# EAGLE board dsub50_molex (EAGLE 9.3.0)
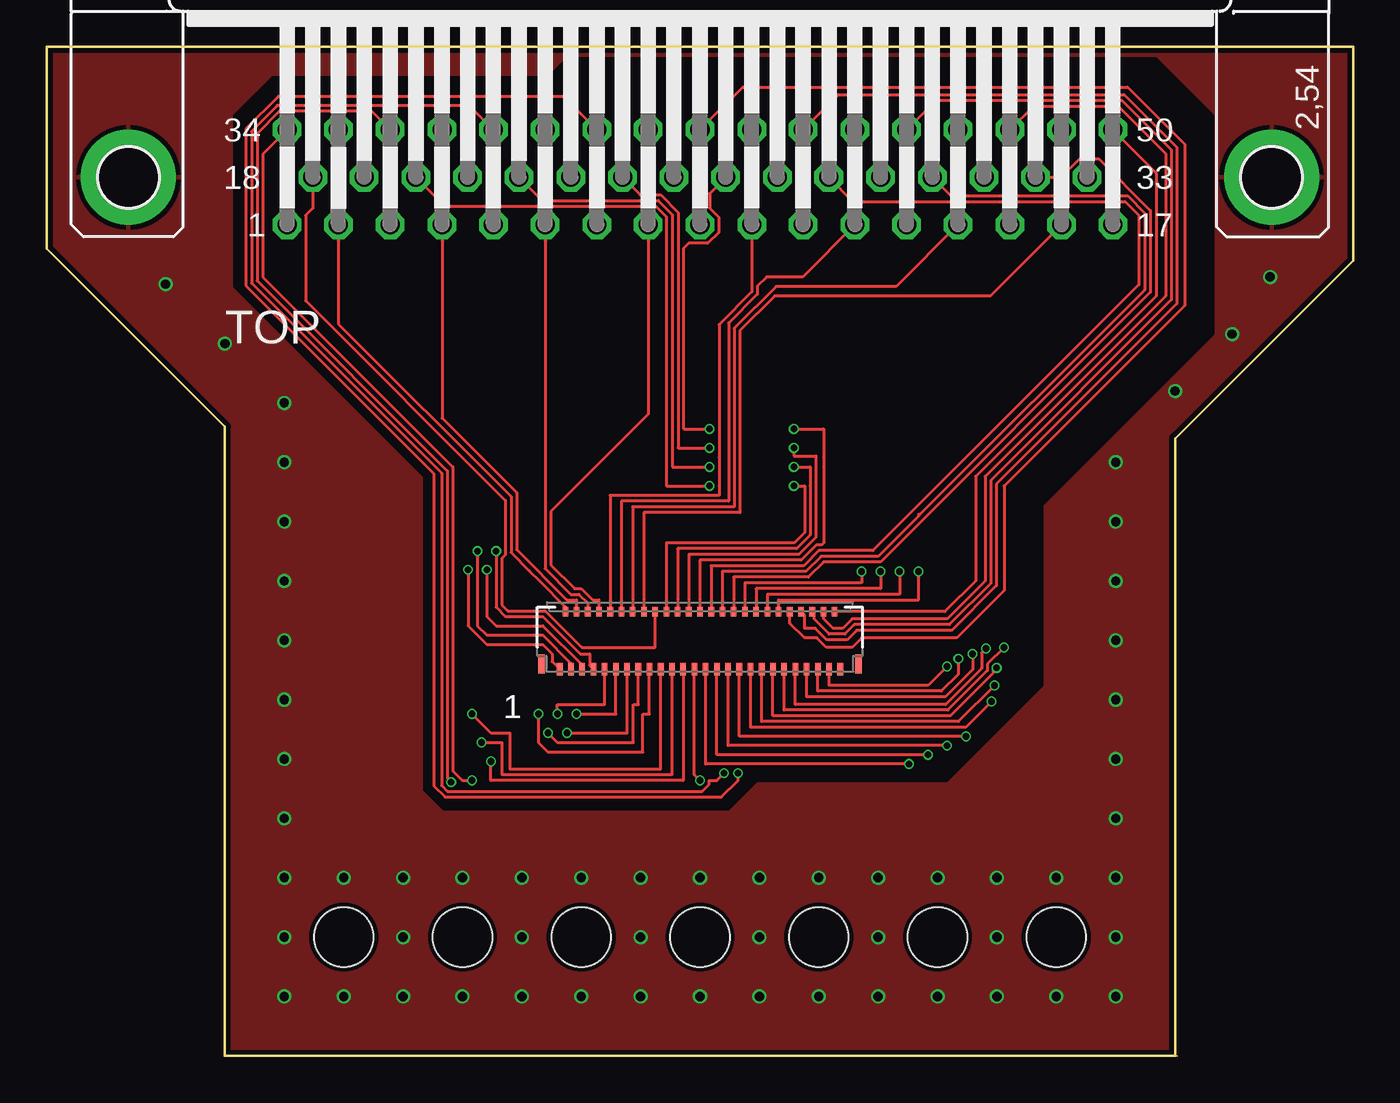
[diagram p0: board, top side]
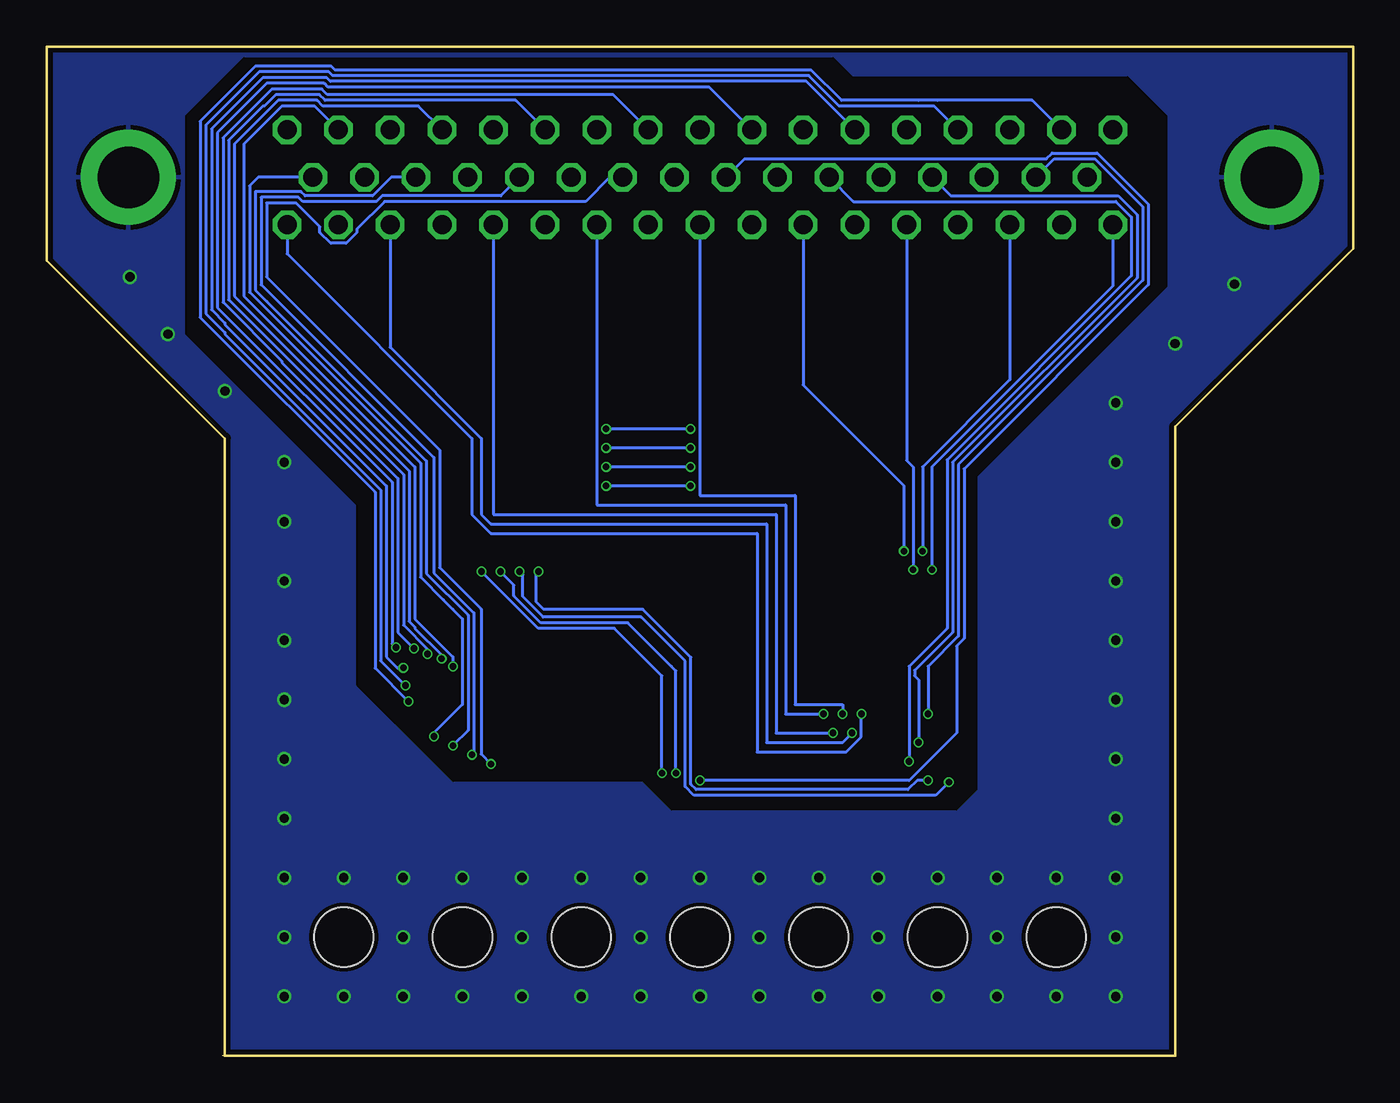
[diagram p1: board, bottom side, seen from below]

Size 69.85 x 53.98 mm. Coordinates in mm from the lower left corner, seen from the top.
Outline: 60.32,0 60.48,0
Outline: 60.32,0 60.32,33.02 69.85,42.55 69.85,53.98 0,53.98 0,43.18 9.53,33.66 9.53,0 60.32,0
Copper layers (1*16): Top 0.035mm / dielectric 1.45mm / Bottom 0.035mm
Design rules "SparkFun-2-layer-FAB-LIMIT *": minimum track width 6mil, minimum drill 0.3mm, track to track 6mil, track to pad 6mil, pad to pad 6mil, via to via 6mil, smd to smd 6mil, copper to edge 10mil, drill to drill 10mil, minimum pad ring 3mil, minimum via ring 3mil, stop-mask expansion 5mil, vias tented up to drill 0.32mm, thermal gap 10mil
Net classes: 0 signal: width 0.152 mm, drill 0.3 mm, clearance 0.152 mm
Holes 3.17 mm at 15.88,6.35 53.98,6.35 22.23,6.35 47.62,6.35 28.58,6.35 34.92,6.35 41.27,6.35
tRestrict: area 10,13.2 to 62.4,53.3
bRestrict: area 10,13.2 to 62.4,53.3
vRestrict: area 22.2,19.1 to 47.6,25.4; area 0,34.9 to 73,54; area 0,9.5 to 15.9,60.3; area 0,-3.2 to 73,12.7; area 54,0 to 73,38.1

## Footprints (pad centres in the part's own frame; a part is rotated, then mirrored left to right if it is on the bottom)
MOLEX_502598-5193_0 = smd 0.3 x 0.67: 1 -7.5,-1.532; 3 -6.9,-1.532; 5 -6.3,-1.532; 7 -5.7,-1.532; 9 -5.1,-1.532; 11 -4.5,-1.532; 13 -3.9,-1.532; 15 -3.3,-1.532; 17 -2.7,-1.532; 19 -2.1,-1.532; 21 -1.5,-1.532; 23 -0.9,-1.532; 25 -0.3,-1.532; 27 0.3,-1.532; 29 0.9,-1.532; 31 1.5,-1.532; 33 2.1,-1.532; 35 2.7,-1.532; 37 3.3,-1.532; 39 3.9,-1.532; 41 4.5,-1.532; 43 5.1,-1.532; 45 5.7,-1.532; 47 6.3,-1.532; 49 6.9,-1.532; 51 7.5,-1.532 | smd 0.3 x 0.5: 2 -7.2,1.532; 4 -6.6,1.532; 6 -6,1.532; 8 -5.4,1.532; 10 -4.8,1.532; 12 -4.2,1.532; 14 -3.6,1.532; 16 -3,1.532; 18 -2.4,1.532; 20 -1.8,1.532; 22 -1.2,1.532; 24 -0.6,1.532; 26 0,1.532; 28 0.6,1.532; 30 1.2,1.532; 32 1.8,1.532; 34 2.4,1.532; 36 3,1.532; 38 3.6,1.532; 40 4.2,1.532; 42 4.8,1.532; 44 5.4,1.532; 46 6,1.532; 48 6.6,1.532; 50 7.2,1.532 | smd 0.35 x 1: MP1 -8.475,-1.267; MP2 8.475,-1.267
F50HP = drill 1.016 octagon: 1 -22.073,-2.54; 2 -19.329,-2.54; 3 -16.561,-2.54; 4 -13.792,-2.54; 5 -11.049,-2.54; 6 -8.28,-2.54; 7 -5.512,-2.54; 8 -2.769,-2.54; 9 0,-2.54; 10 2.769,-2.54; 11 5.512,-2.54; 12 8.28,-2.54; 13 11.049,-2.54; 14 13.792,-2.54; 15 16.561,-2.54; 16 19.329,-2.54; 17 22.073,-2.54; 18 -20.701,0; 19 -17.958,0; 20 -15.189,0; 21 -12.421,0; 22 -9.677,0; 23 -6.909,0; 24 -4.14,0; 25 -1.397,0; 26 1.372,0; 27 4.14,0; 28 6.883,0; 29 9.652,0; 30 12.421,0; 31 15.189,0; 32 17.932,0; 33 20.701,0; 34 -22.073,2.54; 35 -19.329,2.54; 36 -16.561,2.54; 37 -13.792,2.54; 38 -11.049,2.54; 39 -8.28,2.54; 40 -5.512,2.54; 41 -2.769,2.54; 42 0,2.54; 43 2.769,2.54; 44 5.512,2.54; 45 8.28,2.54; 46 11.049,2.54; 47 13.792,2.54; 48 16.561,2.54; 49 19.329,2.54; 50 22.073,2.54 | drill 3.302 pad 5.08: G1 -30.556,0; G2 30.556,0

## Placement (x,y rotation side)
J1  MOLEX_502598-5193MOLEX_502598-5193_0_0  [MOLEX_502598-5193_0]  34.92,22.23 0 top
X1  [F50HP]  34.92,46.99 0 top

## Library data of the parts
J1 = Molex - 502598-5193; CIIVA_IDS: 8412513; CIRCUITS_LOADED: 51; COMPONENT_LINK_1_DESCRIPTION: Manufacturer URL; COMPONENT_LINK_1_URL: http://www.molex.com/molex/index.jsp; COMPONENT_LINK_3_DESCRIPTION: Package Specification; COMPONENT_LINK_3_URL: http://www.molex.com/pdm_docs/sd/5025985193_sd.pdf; CONTACT_POSITION: Dual; CURRENT_MAX_PER_CONTACT: 0.2A; DATASHEET: http://www.molex.com/webdocs/datasheets/pdf/en-us/5025985193_FFC_FPC_CONNECTORS.pdf; DURABILITY_MATING_CYCLES_MAX: 10; ENTRY_ANGLE: 90degrees Angle; FOOTPRINT_VARIANT_NAME_0: Manufacturer Recommended; IMPORTED: yes; IMPORTED_FROM: vault; IMPORT_TS: 1521860080; MATED_HEIGHT: 1.15mm; MATERIAL___METAL: Copper Alloy, Phosphor Bronze; MATERIAL___PLATING_MATING: Gold; MATERIAL___PLATING_TERMINATION: Gold, Tin; MF: Molex; MOUNTING_TECHNOLOGY: Surface Mount; MPN: 502598-5193; NUMBER_OF_ROWS: 1; ORIENTATION: Right Angle; PACKAGE: 502598-5193; PACKAGE_DESCRIPTION: 51-Lead FPC Connector, Pitch 0.3 mm; PACKAGE_VERSION: Rev. B, 08/2013; PACKING: Tape and Reel; PCB_LOCATOR: No; PCB_RETENTION: Yes; PITCH___MATING_INTERFACE: 0.30mm; POLARIZED_TO_PCB: Yes; PREFIX: J; RELEASE_DATE: 1411372322; ROHS: Yes; STACKABLE: No; VAULT_GUID: 79943B7E-3FDB-4B6C-B1B1-74E826A886CC; VAULT_REVISION: 2B392736-9C86-4257-9195-559BF0CEA94B; VOLTAGE_MAX: 50V AC (RMS)/DC
X1 = con-subd; OC_FARNELL: unknown; OC_NEWARK: unknown

## Nets
1: J1.50 X1.50
2: J1.49 X1.49
3: J1.48 X1.48
4: J1.47 X1.47
5: J1.46 X1.46
6: J1.45 X1.45
7: J1.44 X1.44
8: J1.43 X1.43
9: J1.42 X1.42
10: J1.41 X1.41
11: J1.40 X1.40
12: J1.39 X1.39
13: J1.38 X1.38
14: J1.37 X1.37
15: J1.36 X1.36
16: J1.35 X1.35
17: J1.34 X1.34
18: J1.33 X1.33
19: J1.32 X1.32
20: J1.31 X1.31
21: J1.30 X1.30
22: J1.29 X1.29
23: J1.28 X1.28
24: J1.27 X1.27
25: J1.26 X1.26
26: J1.25 X1.25
27: J1.24 X1.24
28: J1.23 X1.23
29: J1.22 X1.22
30: J1.21 X1.21
31: J1.20 X1.20
32: J1.19 X1.19
33: J1.18 X1.18
34: J1.17 X1.17
35: J1.16 X1.16
36: J1.15 X1.15
37: J1.14 X1.14
38: J1.13 X1.13
39: J1.12 X1.12
40: J1.11 X1.11
41: J1.10 X1.10
42: J1.9 X1.9
43: J1.8 X1.8
44: J1.7 X1.7
45: J1.6 X1.6
46: J1.5 X1.5
47: J1.4 X1.4
48: J1.3 X1.3
49: J1.2 X1.2
50: J1.1 X1.1
51: J1.51
GND: X1.G1 X1.G2

## Tracks (layer width: path | path; a pad name or v marks a point on that pad's centre or on a via)
1
  Top 0.152: X1.50 59.31,47.22 59.31,40.64 49.66,30.99 49.66,25.4 48.01,23.76 J1.50
2  (via drill 0.35)
  Top 0.152: v48.13,20.83 47.12,19.81 41.82,19.81 J1.49
  Bottom 0.152: X1.49 55.52,50.8 57.28,50.8 59.31,48.77 59.31,40.64 50.16,31.5 50.16,23.37 48.13,21.34 v48.13,20.83
3
  Top 0.152: X1.48 52.76,50.8 57.28,50.8 59.82,48.26 59.82,40.64 50.16,30.99 50.16,25.4 48.13,23.37 43.05,23.37 42.55,22.86 42.04,22.86 41.53,23.37 J1.48
4  (via drill 0.35)
  Top 0.152: v48.73,21.24 48.73,20.41 47.83,19.51 41.23,19.51 J1.47
  Bottom 0.152: X1.47 49.99,50.8 55.09,50.8 55.4,51.1 57.48,51.1 59.82,48.77 59.82,40.64 50.47,31.29 50.47,23.24 50.16,22.94 50.16,22.86 48.73,21.43 v48.73,21.24
5
  Top 0.152: X1.46 47.55,51.1 57.48,51.1 60.12,48.46 60.12,40.44 50.47,30.79 50.47,25.27 48.26,23.06 43.18,23.06 42.67,22.55 41.83,22.55 41.02,23.37 41.02,23.66 J1.46
6  (via drill 0.35)
  Top 0.152: v49.5,21.5 49.5,20.67 48.03,19.2 40.62,19.2 J1.45
  Bottom 0.152: X1.45 44.78,51.1 54.97,51.1 55.27,51.41 57.61,51.41 58.22,50.8 58.29,50.8 60.12,48.97 60.12,40.44 50.77,31.09 50.77,23.04 49.5,21.76 v49.5,21.5
7
  Top 0.152: X1.44 42.32,51.41 57.61,51.41 60.43,48.59 60.43,40.23 50.77,30.58 50.77,25.15 48.39,22.76 43.31,22.76 42.8,22.25 41.71,22.25 41.1,22.86 40.51,22.86 40.51,23.57 J1.44
8  (via drill 0.35)
  Top 0.152: v50.22,21.79 49.99,21.56 49.99,20.73 48.06,18.8 40.02,18.8 J1.43
  Bottom 0.152: X1.43 39.57,51.41 54.84,51.41 55.15,51.71 57.81,51.71 60.43,49.1 60.43,40.31 57.28,37.16 57.28,37.08 51.08,30.89 51.08,22.65 v50.22,21.79
9
  Top 0.152: X1.42 37.21,51.82 57.78,51.82 60.83,48.77 60.83,40.13 51.18,30.48 51.18,24.89 48.64,22.35 43.56,22.35 43.05,21.84 41.68,21.84 41.17,22.35 40.51,22.35 39.73,23.14 J1.42
10  (via drill 0.35)
  Top 0.152: v51.18,21.84 50.29,20.95 50.29,20.6 48.18,18.49 39.42,18.49 J1.41
  Bottom 0.152: X1.41 34.44,51.82 54.82,51.82 55.02,52.02 58.09,52.02 60.73,49.38 60.73,40.03 51.38,30.68 51.38,22.05 v51.18,21.84
11  (via drill 0.35)
  Top 0.152: X1.40 27.63,51.31 12.37,51.31 10.64,49.58 10.64,41.2 20.7,31.14 20.7,14.44 21.29,13.84 36.07,13.84 36.96,14.73 v36.96,15.12 | J1.40 39.12,24.38 46.61,24.38 v46.61,25.91
  Bottom 0.152: v46.61,25.91 43.56,22.86 39.5,22.86 36.96,20.32 v36.96,15.12
12  (via drill 0.35)
  Top 0.152: v50.78,20.75 50.6,20.57 50.6,20.48 48.31,18.19 38.83,18.19 J1.39
  Bottom 0.152: X1.39 29.23,52.12 54.69,52.12 54.89,52.32 58.29,52.32 61.04,49.58 61.04,39.9 60.32,39.19 60.32,39.12 51.69,30.48 51.69,21.34 51.1,20.75 v50.78,20.75
13  (via drill 0.35)
  Top 0.152: X1.38 22.58,50.83 12.32,50.83 10.95,49.46 10.95,41.33 21.11,31.17 21.11,14.46 21.42,14.15 35.04,14.15 35.42,14.53 35.42,14.71 35.43,14.73 35.82,14.73 v36.21,15.12 | v45.59,25.91 45.59,24.69 38.52,24.69 J1.38
  Bottom 0.152: v36.21,15.12 36.21,20.59 36.45,20.83 38.79,23.16 43.43,23.16 44.87,24.6 44.87,25.18 v45.59,25.91
14  (via drill 0.35)
  Top 0.152: v50.67,19.81 48.74,17.88 38.23,17.88 J1.37
  Bottom 0.152: X1.37 22.4,50.8 27.48,50.8 29.11,52.43 54.56,52.43 54.77,52.63 58.5,52.63 61.34,49.78 61.34,39.7 60.32,38.69 60.32,38.61 51.99,30.28 51.99,21.13 v50.67,19.81
15  (via drill 0.35)
  Top 0.152: X1.36 17.37,50.52 12.44,50.52 11.25,49.33 11.25,41.45 21.41,31.29 21.41,14.85 v21.62,14.64 | v44.58,25.91 44.58,24.99 37.92,24.99 J1.36
  Bottom 0.152: v21.62,14.64 22.33,13.94 35.26,13.94 35.72,14.4 35.72,21.12 38.08,23.47 43.31,23.47 44.4,24.56 44.4,25.73 v44.58,25.91
16  (via drill 0.35)
  Top 0.152: v50.51,18.96 49.13,17.58 37.62,17.58 J1.35
  Bottom 0.152: X1.35 17.17,51.1 22.23,51.1 23.24,51.1 27.36,51.1 28.98,52.73 54.44,52.73 54.64,52.93 58.7,52.93 61.65,49.99 61.65,39.5 52.3,30.15 52.3,20.74 v50.51,18.96
17  (via drill 0.35)
  Top 0.152: X1.34 11.56,48.23 11.56,41.66 21.72,31.5 21.72,15.24 22.23,14.73 v22.73,14.73 | v43.56,25.91 43.56,25.3 37.33,25.3 J1.34
  Bottom 0.152: v22.73,14.73 23.32,14.73 23.81,14.24 35.13,14.24 35.42,14.53 35.42,21.32 37.97,23.88 41.53,23.88 42.55,23.88 43.28,23.88 43.68,24.27 43.68,25.79 v43.56,25.91
18  (via drill 0.35)
  Top 0.152: v49.15,17.09 37.02,17.09 J1.33
  Bottom 0.152: X1.33 58.55,46.99 59,46.53 59,40.84 49.86,31.7 49.86,25.6 48.64,24.38 48.13,23.88 47.62,23.37 47.62,18.8 49.15,17.27 v49.15,17.09
19
  Top 0.152: J1.32 36.73,25.6 40.72,25.6 41.53,26.42 44.58,26.42 59,40.84 59,45.21 56.24,47.98 55.22,47.98 54.23,46.99 X1.32
20  (via drill 0.35)
  Top 0.152: v48.13,16.59 36.42,16.59 J1.31
  Bottom 0.152: X1.31 51.43,46.99 52.43,46 56.04,46 56.27,46.23 58.7,46.23 58.7,40.97 58.08,40.35 49.55,31.82 49.55,25.81 47.32,23.57 47.32,17.41 v48.13,16.59
21
  Top 0.152: X1.30 48.34,46 57.79,46 58.7,45.09 58.7,40.97 46.69,28.96 46.61,28.96 46.61,28.88 44.45,26.72 41.4,26.72 40.59,25.91 36.12,25.91 J1.30
22  (via drill 0.35)
  Top 0.152: v47.12,16.1 35.83,16.1 J1.29
  Bottom 0.152: X1.29 45.57,46 51.92,46 52.22,45.7 56.16,45.7 56.39,45.92 58.39,45.92 58.39,41.25 49.15,32 49.15,25.83 47.02,23.7 47.02,16.2 v47.12,16.1
23
  Top 0.152: X1.28 43.1,45.7 57.66,45.7 57.96,45.39 58.22,45.14 58.39,44.96 58.39,41.25 44.17,27.03 41.28,27.03 40.46,26.21 35.52,26.21 J1.28
24  (via drill 0.35)
  Top 0.152: v46.1,15.61 35.23,15.61 J1.27
  Bottom 0.152: X1.27 39.75,46.99 41.05,45.7 51.79,45.7 53.26,44.22 53.26,44.04 53.84,43.46 54.66,43.46 55.24,44.04 55.24,44.35 56.52,45.62 58.09,45.62 58.09,41.66 48.84,32.41 48.84,26.11 46.63,23.89 46.63,16.14 v46.1,15.61
25  (via drill 0.35)
  Top 0.152: X1.26 35.43,46.13 35.43,45.34 35.92,44.86 35.92,44.04 35.34,43.46 34.31,43.46 34.06,43.21 34.06,33.53 v35.43,33.53 | v39.95,33.53 41.53,33.53 41.53,32 41.53,31.5 41.53,27.43 41.43,27.33 41.15,27.33 40.34,26.52 34.92,26.52 J1.26
  Bottom 0.152: v35.43,33.53 v39.95,33.53
26  (via drill 0.35)
  Top 0.152: v34.92,14.73 34.62,15.03 J1.25
  Bottom 0.152: X1.25 32.54,47.98 16.41,47.98 16.1,48.28 13.69,48.28 10.95,45.55 10.95,41.25 20.8,31.39 20.8,22.33 21.21,21.92 21.21,17.27 23.75,14.73 v34.92,14.73
27  (via drill 0.35)
  Top 0.152: X1.24 31.73,46.05 32.82,46.05 33.76,45.11 33.76,32.51 v35.43,32.51 | v39.95,32.51 39.95,32.09 41.12,32.09 41.12,32 41.12,30.99 41.12,27.73 40.21,26.82 34.33,26.82 J1.24
  Bottom 0.152: v35.43,32.51 v39.95,32.51
28  (via drill 0.35)
  Top 0.152: v23.75,15.75 23.75,14.73 34.02,14.73 J1.23
  Bottom 0.152: X1.23 26.72,45.7 12.7,45.7 11.86,44.86 11.86,41.73 21.72,31.88 21.72,22.86 23.75,20.83 v23.75,15.75
29  (via drill 0.35)
  Top 0.152: X1.22 26.49,45.74 32.69,45.74 33.45,44.99 33.45,31.5 v35.43,31.5 | v39.95,31.5 40.82,31.5 40.82,30.48 40.82,27.86 40.09,27.13 33.73,27.13 J1.22
  Bottom 0.152: v35.43,31.5 v39.95,31.5
30  (via drill 0.35)
  Top 0.152: v23.24,16.76 24.34,16.76 24.34,15.04 33.42,15.04 J1.21
  Bottom 0.152: X1.21 21.51,46 12.57,46 11.56,44.99 11.56,41.61 21.41,31.75 21.41,22.66 23.44,20.62 23.44,20.32 23.24,20.12 v23.24,16.76
31  (via drill 0.35)
  Top 0.152: X1.20 21.29,45.44 32.57,45.44 33.15,44.86 33.15,30.48 v35.43,30.48 | v39.95,30.48 40.51,30.48 40.51,27.99 39.96,27.43 33.12,27.43 J1.20
  Bottom 0.152: v35.43,30.48 v39.95,30.48
32  (via drill 0.35)
  Top 0.152: v22.73,18.29 23.75,17.27 24.77,17.27 24.77,15.34 32.83,15.34 J1.19
  Bottom 0.152: X1.19 15.98,47.98 13.81,47.98 13.08,47.25 13.08,47.24 11.25,45.42 11.25,41.48 21.11,31.62 21.11,22.45 22.73,20.83 v22.73,18.29
33
  Top 0.152: X1.18 14.22,45.34 13.84,44.96 13.84,40.39 24.52,29.71 24.52,26.8 24.33,26.61 24.33,24.13 24.65,23.8 26.65,23.8 28.61,21.84 32.52,21.84 J1.18
34  (via drill 0.35)
  Top 0.152: v26.29,18.29 26.29,16.76 26.8,16.26 31.88,16.26 31.88,18.29 32.23,18.29 J1.17
  Bottom 0.152: X1.17 57,42.9 47.12,33.02 47.12,28.96 46.1,27.94 31.88,27.94 31.88,16.26 27.12,16.26 26.31,17.07 26.31,18.27 v26.29,18.29
35
  Top 0.152: X1.16 50.44,40.64 38.91,40.64 37.06,38.79 37.06,29.06 31.92,29.06 J1.16
36  (via drill 0.35)
  Top 0.152: v26.8,17.27 27.3,16.76 31.37,16.76 31.37,18.8 31.62,18.8 J1.15
  Bottom 0.152: X1.15 51.49,37.9 46.61,33.02 46.61,28.96 46.1,28.45 31.37,28.45 31.37,16.76 27.3,16.76 v26.8,17.27
37
  Top 0.152: X1.14 45.41,41.15 38.99,41.15 36.75,38.91 36.75,29.36 31.33,29.36 J1.14
38  (via drill 0.35)
  Top 0.152: v27.81,17.27 31.02,17.27 J1.13
  Bottom 0.152: X1.13 45.97,28.96 30.86,28.96 30.86,17.27 v27.81,17.27
39
  Top 0.152: X1.12 40.41,41.66 38.48,41.66 38,41.17 38,40.74 36.45,39.19 36.45,29.67 30.73,29.67 J1.12
40  (via drill 0.35)
  Top 0.152: v28.32,18.29 30.42,18.29 J1.11
  Bottom 0.152: X1.11 40.44,29.46 30.35,29.46 30.35,18.29 v28.32,18.29
41
  Top 0.152: X1.10 37.69,40.87 35.94,39.12 35.94,32 35.94,30.48 35.94,29.97 30.12,29.97 J1.10
42  (via drill 0.35)
  Top 0.152: v27.3,18.29 27.3,18.8 29.83,18.8 J1.9
  Bottom 0.152: X1.9 34.92,29.97 29.84,29.97 29.84,18.8 27.3,18.8 v27.3,18.29
43
  Top 0.152: X1.8 32.16,34.31 26.95,29.11 26.95,26.26 28.22,24.99 28.57,24.99 29.18,24.38 29.52,24.38 J1.8
  Bottom 0.152: 32.23,44.45 X1.8
44  (via drill 0.35)
  Top 0.152: v24.02,27 24.02,24 24.52,23.5 26.52,23.5 28.52,21.5 29.02,21.5 29.02,20.89 J1.7
  Bottom 0.152: X1.7 29.41,35.89 24.02,30.5 v24.02,27
45
  Top 0.152: X1.6 26.65,26.06 28.02,24.69 28.45,24.69 28.92,24.21 J1.6
46  (via drill 0.35)
  Top 0.152: v23.52,26 23.52,23.5 24.02,23 26.52,23 28.62,20.9 J1.5
  Bottom 0.152: X1.5 23.88,31.85 23.52,31.5 v23.52,26
47
  Top 0.152: X1.4 21.13,34.11 25.13,30.12 25.13,27.07 27.81,24.38 28.32,24.38 J1.4
48  (via drill 0.35)
  Top 0.152: v23.02,27 23.02,23 23.52,22.5 26.52,22.5 28.02,21 J1.3
  Bottom 0.152: X1.3 18.36,36.16 23.02,31.5 v23.02,27
49
  Top 0.152: X1.2 15.6,39.14 24.82,29.92 24.82,26.92 25.81,25.94 26.34,25.4 27.73,24.02 J1.2
50  (via drill 0.35)
  Top 0.152: v22.52,26 22.52,23 23.52,22 26.52,22 27.02,21.5 27.02,21.09 J1.1
  Bottom 0.152: X1.1 12.85,41.17 22.52,31.5 v22.52,26
GND  (via drill 0.5)
  other vias: 6.35,41.27 9.53,38.1 12.7,34.92 12.7,31.75 57.15,31.75 57.15,28.57 57.15,25.4 57.15,22.23 57.15,19.05 57.15,15.88 57.15,12.7 12.7,12.7 12.7,15.88 12.7,19.05 12.7,22.23 12.7,25.4 12.7,28.57 12.7,9.53 12.7,6.35 12.7,3.17 15.88,3.17 19.05,3.17 19.05,6.35 19.05,9.53 15.88,9.53 22.23,9.53 25.4,9.53 25.4,6.35 25.4,3.17 22.23,3.17 28.58,3.17 31.75,3.17 31.75,6.35 31.75,9.53 28.58,9.53 34.92,9.53 38.1,9.53 38.1,6.35 38.1,3.17 34.92,3.17 41.27,3.17 44.45,3.17 44.45,6.35 44.45,9.53 41.27,9.53 47.62,9.53 50.8,9.53 50.8,6.35 50.8,3.17 47.62,3.17 53.98,3.17 53.98,9.53 57.15,9.53 57.15,6.35 57.15,3.17 60.32,35.56 63.37,38.61 65.41,41.66
  pour Bottom: -3.17,57.15 -3.17,-3.17 73.03,-3.17 73.03,57.15
  pour Top: -3.17,57.15 -3.17,-3.17 73.03,-3.17 73.03,57.15

## Text on the board
tPlace: TOP | 1